# Altium PCB 主板.PcbDoc
Units mm, origin at the board's own origin, x right, y up, seen from the top; angles counter-clockwise.
Board outline 141.99 x 150.24 mm, 2 copper layers (Top Layer, Bottom Layer); 85 components, 80 nets, 354 pads, 36 vias.
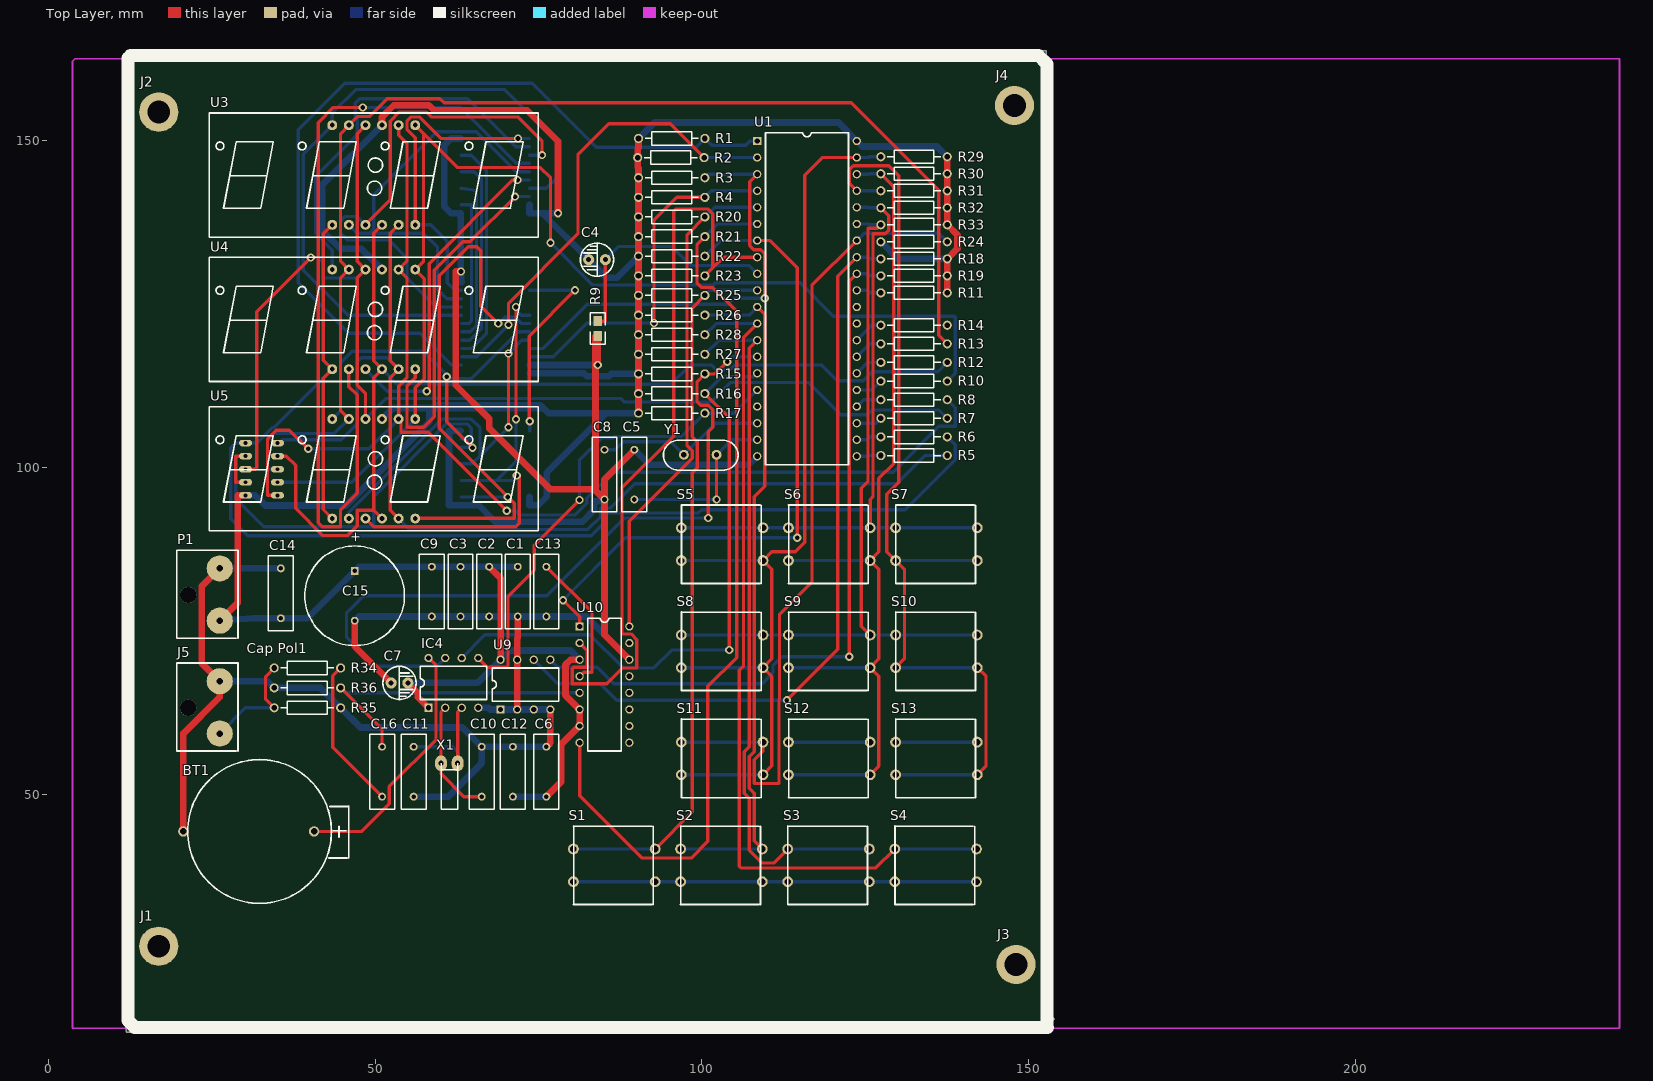
[diagram p0: Top Layer view]
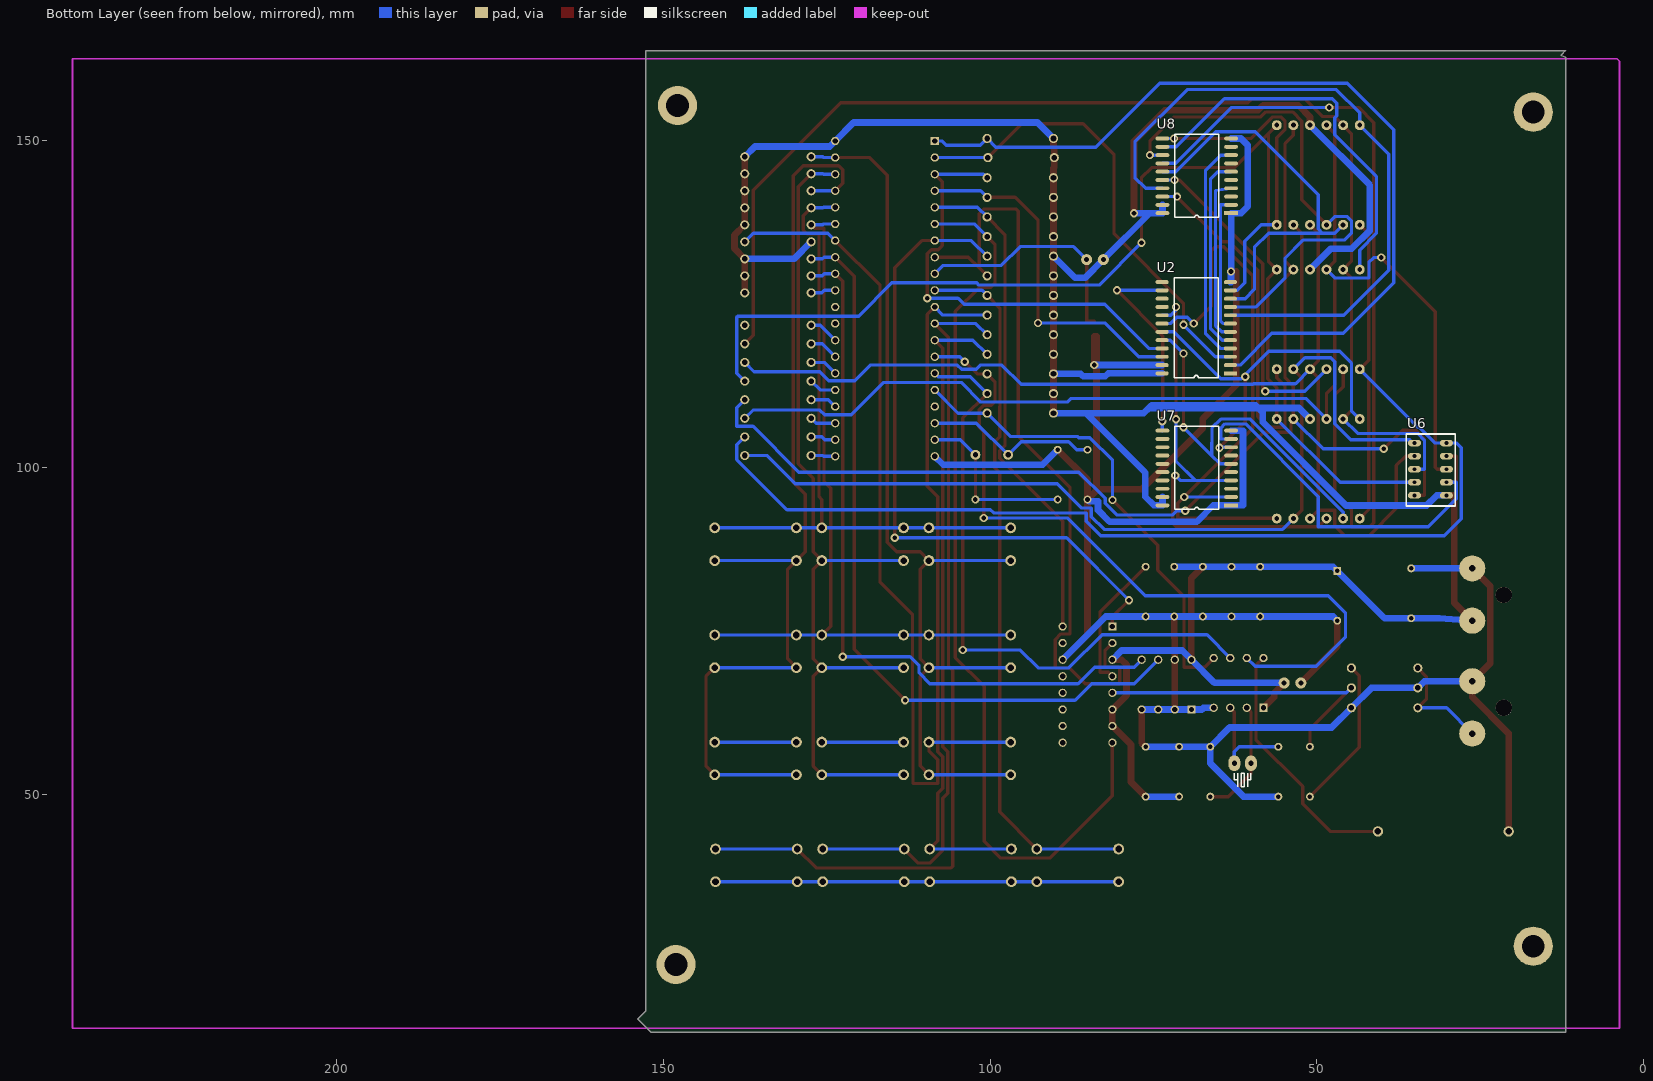
[diagram p1: Bottom Layer view, seen from below]

## Layer stack, top to bottom
Top Layer: signal copper 0.0356
Dielectric: dielectric 0.32, FR-4, Dk 4.8
Bottom Layer: signal copper 0.0356

## Board outline
11.938,162.814 11.938,13.589 151.892,13.589 153.924,15.621 152.654,16.891 152.654,163.83 11.938,163.83 12.573,163.195 12.573,163.068

## Design rules (kind name [scope] priority, off if disabled: settings)
Clearance [All] p1: gap=0.254
HoleSize [All] p1: absolutevalues=TRUE maxlimit=25.4 minlimit=0.025 maxpercent=80.000 minpercent=20.000
MinimumSolderMaskSliver [All] p1: minsoldermaskwidth=0
PolygonConnect [All] p1: connectstyle=Relief reliefconductorwidth=0.254 reliefentries=4 polygonreliefangle="90 Angle"
RoutingVias [All] p1: holewidth=0.711 width=1.27 viastyle="Through Hole" minholewidth=0.711 minwidth=1.27 maxholewidth=0.711 maxwidth=1.27
SilkToSilkClearance [All] p1: silktosilkclearance=0
SilkscreenOverComponentPads [All] p1: minsilkscreentomaskgap=0
SolderMaskExpansion [All] p1: expansion=0.102
Width Width_2 [InNet('DP')] p1: maxlimit=1.016 minlimit=1.016 preferedwidth=1.016 minimp=50.000000 maximp=50.000000 favimp=50.000000
Width Width_1 [InNet('GND')] p2: maxlimit=1.016 minlimit=1.016 preferedwidth=1.016 minimp=50.000000 maximp=50.000000 favimp=50.000000
Width [All] p3: maxlimit=0.508 minlimit=0.508 preferedwidth=0.508 minimp=50.000000 maximp=50.000000 favimp=50.000000
24 further rules are at their usual default settings.

## Components (designator, comment, footprint, x,y, rotation, side; value= is the part's Value field where it differs from the comment)
BT1 "Battery" CR2032-2 40.64,44.323 r180 top
C1 "Cap" RAD-0.3 71.819,81.026 r90 top
C2 "Cap" RAD-0.3 67.437,81.026 r90 top
C3 "Cap" RAD-0.3 63.056,81.026 r90 top
C4 "CAPACITOR POL" 22U1 83.947,131.826 r0 top
C5 "Cap" RAD-0.3 89.662,98.933 r90 top
C6 "Cap" RAD-0.3 76.2,53.467 r90 top
C7 "CAPACITOR POL" 22U1 53.721,67.056 r180 top
C8 "Cap" RAD-0.3 85.09,98.933 r90 top
C9 "Cap" RAD-0.3 58.674,81.026 r90 top
C10 "Cap" RAD-0.3 66.294,53.467 r90 top
C11 "Cap" RAD-0.3 55.88,53.467 r90 top
C12 "Cap" RAD-0.3 71.078,53.467 r270 top
C13 "Cap" RAD-0.3 76.2,81.026 r90 top
C14 "Cap" RAD-0.3 35.56,80.772 r270 top
C15 "Cap Pol1" RB7.6-15 46.863,80.391 r90 top
C16 "Cap" RAD-0.3 51.054,53.467 r270 top
IC4 "DS1302" DIP8 58.166,63.246 r90 top
J1 "CON1" GDK 17.653,26.543 r0 top
J2 "CON1" GDK 17.653,154.178 r0 top
J3 "CON1" GDK 148.844,23.749 r0 top
J4 "CON1" GDK 148.59,155.194 r0 top
J5 "CON2" VOICE-1 26.215,67.31 r270 top
P1 "CON2" VOICE-1 26.215,84.582 r270 top
R1 "Res2" AXIAL-0.4 95.377,150.368 r180 top
R2 "Res2" AXIAL-0.4 95.25,147.447 r180 top
R3 "Res2" AXIAL-0.4 95.377,144.363 r180 top
R4 "Res2" AXIAL-0.4 95.377,141.361 r180 top
R5 "Res2" AXIAL-0.4 132.461,101.854 r0 top
R6 "Res2" AXIAL-0.4 132.461,104.702 r0 top
R7 "Res2" AXIAL-0.4 132.461,107.551 r0 top
R8 "Res2" AXIAL-0.4 132.461,110.399 r0 top
R9 "R-10K" 0805R 84.074,120.142 r90 top
R10 "Res2" AXIAL-0.4 132.461,113.248 r0 top
R11 "Res2" AXIAL-0.4 132.461,126.746 r180 top
R12 "Res2" AXIAL-0.4 132.461,116.096 r0 top
R13 "Res2" AXIAL-0.4 132.461,118.945 r0 top
R14 "Res2" AXIAL-0.4 132.461,121.793 r0 top
R15 "Res2" AXIAL-0.4 95.377,114.341 r180 top
R16 "Res2" AXIAL-0.4 95.377,111.339 r180 top
R17 "Res2" AXIAL-0.4 95.377,108.337 r180 top
R18 "Res2" AXIAL-0.4 132.461,131.953 r0 top
R19 "Res2" AXIAL-0.4 132.461,129.35 r0 top
R20 "Res2" AXIAL-0.4 95.377,138.359 r180 top
R21 "Res2" AXIAL-0.4 95.377,135.357 r180 top
R22 "Res2" AXIAL-0.4 95.377,132.355 r180 top
R23 "Res2" AXIAL-0.4 95.377,129.352 r180 top
R24 "Res2" AXIAL-0.4 132.461,134.556 r180 top
R25 "Res2" AXIAL-0.4 95.377,126.35 r180 top
R26 "Res2" AXIAL-0.4 95.377,123.348 r180 top
R27 "Res2" AXIAL-0.4 95.377,117.343 r180 top
R28 "Res2" AXIAL-0.4 95.377,120.346 r180 top
R29 "Res2" AXIAL-0.4 132.461,147.574 r0 top
R30 "Res2" AXIAL-0.4 132.461,144.97 r0 top
R31 "Res2" AXIAL-0.4 132.461,142.367 r0 top
R32 "Res2" AXIAL-0.4 132.461,139.763 r0 top
R33 "Res2" AXIAL-0.4 132.461,137.16 r0 top
R34 "Res2" AXIAL-0.4 39.624,69.342 r180 top
R35 "Res2" AXIAL-0.4 39.624,63.246 r0 top
R36 "Res2" AXIAL-0.4 39.624,66.294 r0 top
S1 "KEY4" PUSH12 80.361,33.169 r0 top
S2 "KEY4" PUSH12 96.754,33.169 r0 top
S3 "KEY4" PUSH12 113.147,33.169 r0 top
S4 "KEY4" PUSH12 129.54,33.169 r0 top
S5 "KEY4" PUSH12 96.871,82.311 r0 top
S6 "KEY4" PUSH12 113.264,82.311 r0 top
S7 "KEY4" PUSH12 129.657,82.311 r0 top
S8 "KEY4" PUSH12 96.871,65.92 r0 top
S9 "KEY4" PUSH12 113.264,65.92 r0 top
S10 "KEY4" PUSH12 129.657,65.92 r0 top
S11 "KEY4" PUSH12 96.871,49.53 r0 top
S12 "KEY4" PUSH12 113.264,49.53 r0 top
S13 "KEY4" PUSH12 129.657,49.53 r0 top
U1 "AT89C52" DIP40 108.458,149.987 r0 top
U2 "4514" SOP4510 63.219,114.427 r0 bottom
U3 "SR420561K" 5462B 74.93,154.178 r180 top
U4 "SR420561K" 5462B 74.93,132.08 r180 top
U5 "SR420561K" 5462B 74.93,109.22 r180 top
U6 "SN460561" 3121B 35.052,95.758 r180 bottom
U7 "74LS241" SOP241 63.119,94.234 r0 bottom
U8 "74LS241" SOP241 63.119,138.938 r0 bottom
U9 "AT24C02" DIP8 69.188,62.992 r90 top
U10 "YX5P055" DIP16 81.28,75.692 r0 top
X1 "XTAL1" X2 62.611,54.752 r180 top
Y1 "CRYSTAL" OSC2PR-1 98.933,100.711 r0 top

## Footprints (in the part's own frame and the unit in brackets; to place one, negate y for a bottom-side part, rotate by r counter-clockwise, add the part's x,y. Pads: shape width x height; smd on the part's side, far side on the other; paste and mask are expansions set on the pad)
22U1 [mm]
  round 1.7 hole 0.762: 1(-1.27,0) 2(1.27,0)
  silkscreen extent -2.54,-2.54 2.54,2.54
0805R [mil]
  rect 60x50 smd: 1(-0.48,-0.25) 2(89.52,-0.25)
  silkscreen extent -50,-45 140,45
3121B [mm]
  oval 2x1 hole 0.6: a(0.005,8) b(4.885,8) c(4.885,4) com1(4.885,2) com2(4.885,6) d(0.005,0) dp(4.885,0) e(0.005,2) f(0.005,6) g(0.005,4)
  silkscreen extent -1.26,-1.62 6.23,9.38
5462B [mil]
  round 60 hole 30: a(840.2,670) b(1240.2,670) c(1040.2,70) com1(740.2,670) com2(1040.2,670) com3(1140.2,670) com4(1240.2,70) d(840.2,70) dp(940.2,70) e(740.2,70) f(940.2,670) g(1140.2,70)
  silkscreen extent 0,-4 1980,744
AXIAL-0.4 [mm] "Axial Device, Thru-Hole; 2 Leads; 0."
  round 1.4 hole 0.85: 1(-5.08,0) 2(5.08,0)
  silkscreen extent -4.06,-1.02 4.06,1.02
CR2032-2 [mm]
  round 1.6 hole 1: 1(0,-0.003) 2(20,-0.003)
  silkscreen extent -5.33,-11 19.33,11
DIP8 [mil]
  rect 50x50 hole 32: 1(0,0)
  round 50 hole 32: 2(0,-100) 3(0,-200) 4(0,-300) 5(300,-300) 6(300,-200) 7(300,-100) 8(300,0)
  silkscreen extent 50,-350 250,50
DIP16 [mil]
  rect 50x50 hole 32: 1(0,0)
  round 50 hole 32: 2(0,-100) 3(0,-200) 4(0,-300) 5(0,-400) 6(0,-500) 7(0,-600) 8(0,-700) 9(300,-700) 10(300,-600) 11(300,-500) 12(300,-400) 13(300,-300) 14(300,-200) 15(300,-100) 16(300,0)
  silkscreen extent 50,-750 250,50
DIP40 [mil]
  rect 50x50 hole 32: 1(0,0)
  round 50 hole 32: 2(0,-100) 3(0,-200) 4(0,-300) 5(0,-400) 6(0,-500) 7(0,-600) 8(0,-700) 9(0,-800) 10(0,-900) 11(0,-1000) 12(0,-1100) 13(0,-1200) 14(0,-1300) 15(0,-1400) 16(0,-1500) 17(0,-1600) 18(0,-1700) 19(0,-1800) 20(0,-1900) 21(600,-1900) 22(600,-1800) 23(600,-1700) 24(600,-1600) 25(600,-1500) 26(600,-1400) 27(600,-1300) 28(600,-1200) 29(600,-1100) 30(600,-1000) 31(600,-900) 32(600,-800) 33(600,-700) 34(600,-600) 35(600,-500) 36(600,-400) 37(600,-300) 38(600,-200) 39(600,-100) 40(600,0)
  silkscreen extent 50,-1950 550,50
GDK [mm]
  round 6 hole 3.5: 1(-0.774,0.222)
OSC2PR-1 [mil]
  round 60 hole 32: 1(-66.72,49.28) 2(130.28,49.28)
  silkscreen extent -190,-43 260,137
PUSH12 [mil]
  round 65 hole 39.37: 1(-0.86,333.42) 2(491.27,333.42) 3(-0.86,136.57) 4(491.27,136.57)
  silkscreen extent -3,-2 480,472
RAD-0.3 [mm] "Radial Cap, Thru-Hole; 2 Leads; 0."
  round 1.2 hole 0.7: 1(-3.81,0) 2(3.81,0)
  silkscreen extent -5.71,-1.9 5.71,1.91
RB7.6-15 [mm] "Polarized Capacitor (R"
  rect 1.2x1.2 hole 0.7: 1(3.81,0)
  round 1.2 hole 0.7: 2(-3.81,0)
  silkscreen extent -7.62,-7.62 7.62,7.62
SOP241 [mm]
  rect 2.1x0.6 smd: 1(0,0)
  oval 2.1x0.6 smd: 2(0,-1.27) 3(0,-2.54) 4(0,-3.81) 5(0,-5.08) 6(0,-6.35) 7(0,-7.62) 8(0,-8.89) 9(0,-10.16) 10(0,-11.43) 11(10.5,-11.43) 12(10.5,-10.16) 13(10.5,-8.89) 14(10.5,-7.62) 15(10.5,-6.35) 16(10.5,-5.08) 17(10.5,-3.81) 18(10.5,-2.54) 19(10.5,-1.27) 20(10.5,0)
  silkscreen extent 1.88,-12.06 8.62,0.64
SOP4510 [mm]
  rect 2x0.6 smd: 1(0,0)
  oval 2x0.6 smd: 2(0,-1.27) 3(0,-2.54) 4(0,-3.81) 5(0,-5.08) 6(0,-6.35) 7(0,-7.62) 8(0,-8.89) 9(0,-10.16) 10(0,-11.43) 11(0,-12.7) 12(0,-13.97) 13(10.45,-13.97) 14(10.45,-12.7) 15(10.45,-11.43) 16(10.45,-10.16) 17(10.45,-8.89) 18(10.45,-7.62) 19(10.45,-6.35) 20(10.45,-5.08) 21(10.45,-3.81) 22(10.45,-2.54) 23(10.45,-1.27) 24(10.45,0)
  silkscreen extent 1.83,-14.6 8.62,0.64
VOICE-1 [mm]
  round 4 hole 1: 1(0,0) 2(8,0)
  round 2.5 hole 2.5: 3(4.064,-4.826)
  silkscreen extent -2.79,-6.6 10.67,2.79
X2 [mm]
  oval 1.8x2.4 hole 0.8: 1(0,0) 2(2.54,0)
  silkscreen extent 0,0 2.54,7

## Part data
BT1: "Multicell Batte"
C1 C2 C3 C5 C6 C8 C9 C10 C11 C12 C13 C14 C16: "Capacitor"
C4 C7: "Capacit"
C15: "Polarized Capacitor (Radial)"
IC4: library part DS13
J1 J2 J3 J4 J5 P1: "Connect"
R1 R2 R3 R4 R5 R6 R7 R8 R10 R11 R12 R13 R14 R15 R16 R17 R18 R19 R20 R21 R22 R23 R24 R25 R26 R27 R28 R29 R30 R31 R32 R33 R34 R35 R36: "Resistor"
R9: "resist"
S1 S2 S3 S4 S5 S6 S7 S8 S9 S10 S11 S12 S13: library part KE
U1: "8-Bit Microcontroller with 8K Flash R"
U2: library part 45
U3 U4 U5: "CP-SR42056"
U6: "CP-SN46056"
U7 U8: library part 74LS2
U10: library part YX5P0
X1: library part XTA
Y1: "Cryst"

## Via types
v1: diameter 1.27, hole 0.711, Top Layer to Bottom Layer, 36 vias

## Nets (pads, with @x,y where several pads share a name; then routed paths per layer and width w, separated by ;. In a path a pad name is that pad's centre, name@x,y a point inside that pad or via, vN(x,y) a via of type N, cw(c..) or ccw(c..) an arc to the next point about the centre after c; other vN are vias at no path point)
BJ1: R25.1 S1.1 S1.2 U1.10 | length 109.3
  Top Layer w0.508: S1.2 98.527,47.326 98.527,99.238 99.27,99.982 99.27,103.995 98.527,104.738 98.527,109.329 98.487,109.369 98.487,124.38 R25.1
  Bottom Layer w0.508: S1.1 S1.2 ; R25.1 101.234,127.127 U1.10
BJ2: R26.1 S2.1 S2.2 U1.11 | length 106.2
  Top Layer w0.508: U1.11 109.601,123.444 109.601,97.13 108.001,95.529 108.001,56.505 107.254,55.757 107.254,50.903 108.001,50.156 108.001,42.87 S2.2
  Bottom Layer w0.508: S2.1 S2.2 ; R26.1 107.219,123.348 U1.11
BJ3: R27.1 S3.1 S3.2 U1.13 | length 108.1
  Top Layer w0.508: U1.13 107.239,118.288 107.239,57.267 106.492,56.519 106.492,50.141 107.239,49.394 107.239,41.478 109.22,39.497 110.984,39.497 S3.1
  Bottom Layer w0.508: R27.1 102.621,119.507 U1.13 ; S3.1 S3.2
BJ4: R28.1 S4.1 S4.2 U1.12 | length 130.5
  Top Layer w0.508: U1.12 106.375,119.964 106.375,69.647 105.715,68.986 105.715,38.989 105.969,38.735 126.615,38.735 S4.1
  Bottom Layer w0.508: R28.1 102.158,122.047 U1.12 ; S4.1 S4.2
DA: R5.2 U3.a U4.a U5.a U6.a | length 167.8
  Top Layer w0.508: U5.a 52.319,93.472 52.319,113.792 U4.a 52.319,116.332 52.319,135.89 U3.a
  Bottom Layer w0.508: U6.a 35.744,103.758 35.744,104.279 44.838,104.279 47.239,106.68 47.239,116.205 47.874,116.84 51.811,116.84 U4.a ; U5.a 55.247,90.544 82.556,90.544 84.502,92.489 84.502,93.828 86.03,93.828 89.738,97.536 129.794,97.536 134.112,101.854 R5.2
DB: R6.2 U3.b U4.b U5.b U6.b | length 200.1
  Top Layer w0.508: U5.b 42.037,93.594 42.037,113.67 U4.b 42.037,116.454 42.037,135.768 U3.b
  Bottom Layer w0.508: U4.b 34.522,106.155 34.29,106.155 31.893,103.758 U6.b 28.575,103.758 27.889,103.072 27.889,92.177 30.48,89.586 83.058,89.586 85.264,91.791 85.264,93.066 99.441,93.066 99.949,93.574 131.089,93.574 138.76,101.244 138.76,103.483 R6.2
DC: R7.2 U3.c U4.c U5.c U6.c | length 190.7
  Top Layer w0.508: U6.c 31.547,99.758 31.852,100.063 31.852,123.876 v1(40.132,132.156) ; U5.c 48.509,111.369 47.239,112.639 47.239,129.032 U4.c 47.239,131.572 47.239,151.13 U3.c
  Bottom Layer w0.508: v1(40.132,132.156) 41.303,132.156 42.014,131.445 42.014,129.032 47.239,129.032 U4.c ; U5.c 51.633,110.566 87.63,110.566 88.163,110.033 101.422,110.033 104.419,113.03 116.281,113.03 121.234,108.077 125.324,108.077 126.06,108.814 136.278,108.814 R7.2
DD: R8.2 U3.d U4.d U5.d U6.d | length 183.8
  Top Layer w0.508: U6.d 33.528,95.758 33.528,104.394 34.874,105.74 36.881,105.74 v1(39.751,102.87) ; U3.d 53.589,150.876 54.859,149.606 54.859,131.572 U4.d 54.859,129.032 54.859,113.737 53.589,112.467 U5.d 53.941,107.09 53.941,105.41 58.141,105.41 v1(70.129,93.421)
  Bottom Layer w0.508: v1(39.751,102.87) 49.017,102.87 U5.d ; v1(70.129,93.421) 71.399,93.421 72.06,92.761 80.637,92.761 82.398,94.521 82.398,95.3 86.411,99.314 129.261,99.314 136.271,106.324 138.76,106.324 138.76,109.18 R8.2
DE: R10.2 U3.e U4.e U5.e U6.e | length 181.6
  Top Layer w0.508: U5.e 56.129,112.213 57.506,113.589 57.506,128.925 U4.e 57.404,131.577 57.404,151.125 ; U3.e 57.404,151.125 ; v1(76.835,134.417) 76.835,144.348 75.26,145.923 62.606,145.923 57.404,151.125
  Bottom Layer w0.508: U6.e 46.445,97.758 U5.e ; v1(76.835,134.417) 83.312,127.94 101.727,127.94 102.057,128.27 115.037,128.27 120.117,123.19 138.633,123.19 138.76,123.063 138.76,114.467 R10.2
DF: R12.2 U3.f U4.f U5.f U6.f | length 165
  Top Layer w0.508: U6.f 36.393,101.758 37.821,100.33 37.821,93.802 42.012,89.611 45.72,89.611 47.239,91.13 47.239,93.472 49.779,93.472 ; U5.f 49.779,93.472 ; U3.f 49.779,135.89 49.779,116.332 U4.f 49.779,113.792 49.779,93.472
  Bottom Layer w0.508: U4.f 53.254,112.857 59.673,112.857 59.792,112.738 95.263,112.738 98.222,115.697 101.49,115.697 102.133,115.053 104.354,115.053 104.998,115.697 118.313,115.697 120.726,113.284 124.689,113.284 126.086,114.681 136.126,114.681 R12.2
DG: R13.2 U3.g U4.g U5.g U6.g | length 188.6
  Top Layer w0.508: U5.g 44.699,108.712 44.699,129.032 U4.g 44.699,131.572 44.699,151.13 U3.g 47.29,153.721 49.068,153.721 51.811,156.464 59.912,156.464 60.547,155.829 122.86,155.829 136.22,142.469 136.22,120.265 R13.2
  Bottom Layer w0.508: U6.g 33.528,99.758 33.528,104.216 34.544,105.232 43.759,105.232 U5.g
DP: C1.2 C2.2 C3.2 C4.1 C6.1 C7.1 C9.2 C12.2 C14.2 C15.1 IC4.1 P1.2 R1.2 R2.2 R3.2 R4.2 R11.1 R15.2 R16.2 R17.2 R18.2 R19.2 R20.2 R21.2 R22.2 R23.2 R24.2 R25.2 R26.2 R27.2 R28.2 R29.2 R30.2 R31.2 R32.2 R33.2 U1.40 U2.24 U3.dp U4.dp U5.dp U6.dp U7.19 U7.20 U8.19 U8.20 U9.8 U10.3 U10.6 U10.7 | length 507.5
  Top Layer w1.016: P1.2 28.981,79.348 28.981,95.758 U6.dp ; U3.dp 51.049,153.665 52.832,155.448 58.217,155.448 58.979,154.686 73.228,154.686 77.978,149.936 v1(77.978,138.938) ; C7.1 56.515,65.532 56.515,64.897 IC4.1 ; C2.2 69.188,83.085 U9.8 ; C6.1 78.435,51.892 78.435,57.607 U10.7 U10.6 79.121,65.151 79.121,69.85 79.883,70.612 U10.3 ; R17.2 R16.2 R15.2 R27.2 R28.2 R26.2 R25.2 R23.2 R22.2 R21.2 R20.2 R4.2 R3.2 90.297,145.821 90.17,145.948 R2.2 90.17,148.819 90.297,148.946 R1.2 ; R11.1 R19.2 R18.2 139.116,133.528 139.116,135.585 R33.2 R32.2 R31.2 R30.2 R29.2
  Bottom Layer w1.016: P1.2 31.266,76.962 C14.2 39.624,76.962 C15.1 47.498,84.836 C9.2 C3.2 C2.2 C1.2 ; U6.dp 31.648,95.758 33.198,94.209 45.531,94.209 58.259,106.937 58.259,108.458 58.927,109.127 ; U5.dp 52.733,109.127 58.927,109.127 ; U4.dp 47.843,133.508 44.647,133.508 41.885,136.271 41.885,143.236 U3.dp ; C7.1 65.632,67.056 U9.8 70.585,72.009 79.883,72.009 U10.3 ; C12.2 C6.1 ; U7.19 U7.20 74.93,94.234 76.251,95.555 76.251,99.238 85.35,108.337 ; U8.19 U8.20 75.565,138.938 ; U2.24 81.915,114.427 82.362,113.98 85.762,113.98 86.123,114.341 R15.2 ; v1(77.978,138.938) 75.565,138.938 ; R17.2 85.35,108.337 ; R22.2 86.974,129.032 85.471,129.032 C4.1 75.565,138.938 ; R1.2 92.735,152.806 120.879,152.806 U1.40 124.536,149.149 135.966,149.149 R29.2 ; R24.2 129.984,131.953 R18.2 ; 58.927,109.127 59.346,109.545 75.286,109.545 75.704,109.127 ; 58.927,109.127 75.704,109.127 ; 75.704,109.127 76.494,108.337 85.35,108.337
GND: BT1.2 C1.1 C2.1 C3.1 C5.2 C6.2 C7.2 C8.1 C9.1 C10.2 C11.1 C12.1 C13.1 C14.1 C15.2 IC4.4 J5.1 P1.1 R9.1 R35.2 R36.1 U1.20 U2.12 U2.23 U7.1 U7.10 U8.1 U8.10 U9.1 U9.2 U9.3 U9.4 U9.7 U10.14 | length 423.3
  Top Layer w1.016: BT1.2 20.64,59.324 26.215,64.9 J5.1 23.444,70.081 23.444,81.811 P1.1 ; C15.2 46.863,72.644 C7.2 ; v1(63.137,130.023) 62.332,130.023 62.332,112.602 67.441,107.493 67.441,106.045 76.774,96.712 83.501,96.712 83.718,96.495 ; U9.2 U9.7 71.728,73.863 71.819,73.954 C1.1 ; C6.2 76.808,57.885 U9.4 ; v1(84.08,115.697) R9.1 83.718,120.13 83.718,96.495 ; U10.14 85.09,74.422 C8.1 ; C5.2 85.09,98.171 C8.1 ; 83.718,96.495 C8.1
  Bottom Layer w1.016: J5.1 33.528,67.31 R36.1 41.656,66.294 R35.2 47.727,60.223 63.348,60.223 C10.2 ; P1.1 C14.1 ; C15.2 47.498,77.216 C9.1 C3.1 C2.1 C1.1 C13.1 82.296,77.216 U10.14 ; C11.1 61.214,49.657 66.294,54.737 C10.2 ; U7.10 61.305,105.664 61.305,94.234 U7.1 65.837,94.234 68.351,91.72 81.7,91.72 83.486,93.505 83.486,94.844 84.811,94.844 C8.1 ; U8.1 U8.1@63.097,138.938 ; U8.10 61.595,150.368 60.545,149.318 60.545,139.988 61.595,138.938 U8.1@63.097,138.938 ; v1(63.137,130.023) U2.12@63.137,128.397 ; U2.12 U2.12@63.137,128.397 ; IC4.4 67.335,63.246 67.589,62.992 U9.1 U9.2 U9.3 U9.4 ; U2.23 v1(84.08,115.697) ; C6.2 C12.1 C10.2 ; C5.2 91.973,100.432 107.163,100.432 U1.20 ; U8.1@63.097,138.938 63.097,128.397 U2.12@63.137,128.397
IO: IC4.6 R16.1 U1.15 | length 95.7
  Top Layer w0.508: R16.1 104.191,107.605 v1(104.191,72.085)
  Bottom Layer w0.508: IC4.6 66.802,74.422 82.855,74.422 87.935,69.342 92.634,69.342 95.377,72.085 v1(104.191,72.085) ; R16.1 103.012,113.894 107.925,113.894 U1.15
KEY1: R29.1 S5.3 S5.4 S8.3 S8.4 S11.3 S11.4 U1.39 | length 149.1
  Top Layer w0.508: S11.4 110.693,54.343 110.693,68.045 S8.4 110.693,70.734 110.693,84.436 S5.4 110.691,87.122 114.3,87.122 115.722,88.544 115.722,144.78 118.389,147.447 U1.39
  Bottom Layer w0.508: S11.3 S11.4 ; S8.3 S8.4 ; S5.3 S5.4 ; U1.39 125.476,147.447 125.603,147.574 R29.1
KEY2: R30.1 S6.3 S6.4 S9.3 S9.4 S12.3 S12.4 U1.38 | length 137.7
  Top Layer w0.508: S12.4 127.076,54.333 127.076,68.055 S9.4 127.076,70.724 127.076,84.446 S6.4 127.076,87.114 127.076,98.349 129.351,100.624 129.351,143 R30.1
  Bottom Layer w0.508: S12.3 S12.4 ; S9.3 S9.4 ; S6.3 S6.4 ; U1.38 125.501,144.907 125.565,144.97 R30.1
KEY3: R31.1 S7.3 S7.4 S10.3 S10.4 S13.3 S13.4 U1.37 | length 148.6
  Top Layer w0.508: U1.37 122.555,143.51 122.555,145.567 123.19,146.202 128.6,146.202 130.124,144.678 130.124,97.765 128.295,95.936 128.295,87.12 S7.3 130.988,84.427 130.988,70.742 S10.3 ; S13.4 143.485,54.348 143.485,68.04 S10.4
  Bottom Layer w0.508: U1.37 R31.1 ; S13.3 S13.4 ; S10.3 S10.4 ; S7.3 S7.4
KEY4: R32.1 S5.1 S5.2 S6.1 S6.2 S7.1 S7.2 U1.36 | length 100.7
  Top Layer w0.508: S6.2 125.742,95.123 126.173,95.554 126.173,135.788 128.016,135.788 128.589,136.361 128.589,138.555 R32.1
  Bottom Layer w0.508: S5.1 S5.2 S6.1 S6.2 S7.1 S7.2 ; U1.36 125.501,139.827 125.565,139.763 R32.1
KEY5: R33.1 S8.1 S8.2 S9.1 S9.2 S10.1 S10.2 U1.35 | length 114.4
  Top Layer w0.508: S9.2 124.384,75.748 124.384,96.845 125.411,97.872 125.411,136.609 126.83,136.609 R33.1
  Bottom Layer w0.508: S8.1 S8.2 S9.1 S9.2 S10.1 S10.2 ; U1.35 125.476,137.287 125.603,137.16 R33.1
KEY6: R24.1 S11.1 S11.2 U1.34 | length 126
  Top Layer w0.508: S11.2 109.349,56.644 108.016,55.311 108.016,51.664 111.785,51.664 111.862,77.495 116.84,82.474 116.84,127.889 U1.34
  Bottom Layer w0.508: S11.1 S11.2 ; U1.34 124.841,135.89 136.207,135.89 R24.1
LEDA: U7.12
MRST: C4.2 R9.2 U1.9 | length 36.3
  Top Layer w0.508: R9.2 85.217,122.416 C4.2
  Bottom Layer w0.508: C4.2 87.224,133.833 95.377,133.833 98.273,130.937 107.188,130.937 U1.9
NetBT1_1: BT1.1 IC4.8 | length 39
  Top Layer w0.508: BT1.1 47.958,44.326 52.172,48.539 52.172,51.206 59.309,58.344 59.309,69.723 IC4.8
NetC5_1: C5.1 U1.19 Y1.2 | length 26.6
  Top Layer w0.508: v1(102.242,95.123) Y1.2
  Bottom Layer w0.508: C5.1 v1(102.242,95.123) ; Y1.2 104.546,104.267 U1.19
NetC8_2: C8.2 U1.18 Y1.1 | length 26.7
  Bottom Layer w0.508: C8.2 86.766,102.743 87.986,103.962 95.239,103.962 Y1.1 102.083,106.807 U1.18
NetC10_1: C10.1 IC4.2 X1.2 | length 18
  Top Layer w0.508: IC4.2 60.071,62.611 X1.2 60.071,53.137 63.551,49.657 C10.1
NetC11_2: C11.2 IC4.3 X1.1 | length 17.6
  Top Layer w0.508: X1.1 62.611,62.611 IC4.3
  Bottom Layer w0.508: C11.2 61.849,57.277 62.611,56.515 X1.1
NetC13_2: C13.2 U10.4 | length 21.2
  Top Layer w0.508: C13.2 83.185,77.851 83.185,68.707 81.915,68.707 U10.4
NetC16_2: C16.2 R34.1 | length 23.3
  Top Layer w0.508: R34.1 43.485,68.123 43.485,57.226 C16.2
NetJ5_2: J5.2 R34.2 R35.1 | length 17.1
  Top Layer w0.508: R35.1 33.223,64.567 33.223,68.021 R34.2
  Bottom Layer w0.508: J5.2 30.151,63.246 R35.1
NetR5_1: R5.1 U1.21 | length 3.7
  Bottom Layer w0.508: U1.21 125.476,101.727 125.603,101.854 R5.1
NetR6_1: R6.1 U1.22 | length 3.9
  Bottom Layer w0.508: U1.22 125.298,104.267 125.734,104.702 R6.1
NetR7_1: R7.1 U1.23 | length 4
  Bottom Layer w0.508: U1.23 126.637,106.807 R7.1
NetR8_1: R8.1 U1.24 | length 4.1
  Bottom Layer w0.508: U1.24 124.75,110.399 R8.1
NetR10_1: R10.1 U1.25 | length 4.2
  Bottom Layer w0.508: U1.25 126.02,111.887 R10.1
NetR11_2: R11.2 U1.31 | length 3.8
  Bottom Layer w0.508: U1.31 125.349,127.127 125.73,126.746 R11.2
NetR12_1: R12.1 U1.26 | length 4.4
  Bottom Layer w0.508: U1.26 125.367,116.096 R12.1
NetR13_1: R13.1 U1.27 | length 4.5
  Bottom Layer w0.508: U1.27 125.676,118.945 R13.1
NetR14_1: R14.1 U1.28 | length 4.6
  Bottom Layer w0.508: U1.28 125.984,121.793 R14.1
NetS1_3: S1.3 S1.4 S2.3 S2.4 S3.3 S3.4 S4.3 S4.4 | length 61.7
  Bottom Layer w0.508: S1.3 S1.4 S2.3 S2.4 S3.3 S3.4 S4.3 S4.4
NetS12_1: S12.1 S12.2 | length 12.5
  Bottom Layer w0.508: S12.1 S12.2
NetS13_1: S13.1 S13.2 | length 12.5
  Bottom Layer w0.508: S13.1 S13.2
RST: IC4.5 R17.1 U1.16 | length 73
  Top Layer w0.508: IC4.5 67.183,69.469 70.333,69.469 70.333,80.315 74.346,84.328 74.346,88.138 v1(81.255,95.047)
  Bottom Layer w0.508: v1(81.255,95.047) 81.255,101.117 84.709,104.572 86.462,104.572 86.665,104.775 96.895,104.775 R17.1 104.908,108.337 U1.16
S1_1: U8.9
S1_2: U8.7
S1_3: U8.5
S1_4: U8.3
S2_1: U4.com1 U8.18 | length 56
  Top Layer w0.508: U4.com1 56.129,113.741 54.859,112.471 54.859,106.172 57.404,106.172 59.055,107.823 59.055,112.776 59.03,112.801 59.03,130.226 63.373,134.569 64.491,134.569 v1(71.399,141.478)
  Bottom Layer w0.508: v1(71.399,141.478) U8.18
S2_2: U4.com2 U8.16 | length 51.1
  Top Layer w0.508: v1(57.912,111.709) 58.268,112.065 58.268,131.224 71.062,144.018 v1(71.78,144.018)
  Bottom Layer w0.508: U4.com2 51.862,111.709 v1(57.912,111.709) ; v1(71.78,144.018) U8.16
S2_3: U4.com3 U8.14 | length 127.5
  Top Layer w0.508: U4.com3 45.969,112.395 47.239,111.125 47.239,96.083 44.699,93.543 44.699,90.932 41.91,90.932 41.275,91.567 41.275,152.781 43.612,155.118 v1(48.108,155.118)
  Bottom Layer w0.508: v1(48.108,155.118) 62.992,155.118 71.552,146.558 U8.14
S2_4: U4.com4 U8.12 | length 59.3
  Bottom Layer w0.508: U4.com4 43.429,133.29 40.869,135.85 40.869,144.557 47.239,150.927 47.239,153.543 46.965,153.817 46.965,155.778 47.625,156.439 64.135,156.439 71.476,149.098 U8.12
S3_1: U7.18
S3_2: U7.16
S3_3: U7.14
S4: U6.com1 U6.com2 U7.9 | length 61.6
  Top Layer w0.508: U6.com1 28.651,97.758 28.651,101.758 U6.com2
  Bottom Layer w0.508: U6.com1 28.651,97.758 28.651,95.25 32.969,90.932 49.779,90.932 49.779,95.575 60.884,106.68 64.059,106.68 64.694,106.045 64.694,104.394 U7.9
SCL: R18.1 U1.33 U9.6 | length 117.3
  Top Layer w0.508: v1(113.005,64.389) 120.802,72.187 120.802,129.311 U1.33
  Bottom Layer w0.508: U9.6 77.951,66.929 84.455,66.929 86.995,64.389 v1(113.005,64.389) ; U1.33 125.4,132.207 125.654,131.953 R18.1
SCLK: IC4.7 R15.1 U1.14 | length 116.2
  Top Layer w0.508: v1(100.965,92.304) 100.965,105.461 101.676,106.172 101.676,108.839 100.965,109.55 99.808,109.55 99.249,110.109 99.249,113.133 R15.1 101.997,114.341 v1(103.861,116.205)
  Bottom Layer w0.508: IC4.7 59.436,69.596 50.063,69.596 45.618,74.041 45.618,77.775 48.26,80.416 76.272,80.416 88.159,92.304 v1(100.965,92.304) ; v1(103.861,116.205) 104.623,116.967 U1.14
SD1: R1.1 U1.1 U2.2 | length 132.1
  Bottom Layer w0.508: U2.2 61.722,115.697 56.871,120.548 45.974,120.548 38.227,128.295 38.227,151.714 45.339,158.826 74.041,158.826 83.82,149.047 99.136,149.047 R1.1 101.473,149.352 106.743,149.352 107.379,149.987 U1.1
SD2: R2.1 U1.2 U2.3 | length 71.2
  Top Layer w0.508: v1(70.409,121.869) 70.409,125.171 81.026,135.788 81.026,147.879 85.776,152.629 95.148,152.629 R2.1
  Bottom Layer w0.508: U2.3 65.507,116.967 v1(70.409,121.869) ; R2.1 U1.2
SD3: R3.1 U1.3 U2.21 | length 68.3
  Top Layer w0.508: U1.3 107.315,143.764 107.315,133.985 107.95,133.35 108.966,133.35 109.601,132.715 v1(109.601,125.933)
  Bottom Layer w0.508: U2.21 75.717,118.237 82.474,124.993 103.962,124.993 104.902,125.933 v1(109.601,125.933) ; R3.1 101.001,144.907 U1.3
SD4: R4.1 U1.4 U2.22 | length 54.5
  Top Layer w0.508: v1(92.659,122.123) 92.659,137.846 96.175,141.361 R4.1
  Bottom Layer w0.508: U2.22 77.241,116.967 82.398,122.123 v1(92.659,122.123) ; R4.1 101.463,142.367 U1.4
SDA: R19.1 U1.32 U9.5 | length 112.5
  Top Layer w0.508: v1(122.555,71.069) 122.555,128.524 U1.32
  Bottom Layer w0.508: U9.5 77.951,69.469 83.998,69.469 86.538,66.929 109.22,66.929 110.871,68.58 110.871,69.698 112.243,71.069 v1(122.555,71.069) ; U1.32 125.374,129.667 125.692,129.35 R19.1
SI1_1: U2.11 U3.com1 U8.11 | length 51.8
  Top Layer w0.508: U3.com1 56.129,150.495 54.859,151.765 54.859,153.035 55.494,153.67 56.744,153.67 60.046,150.368 v1(71.857,150.368)
  Bottom Layer w0.508: U3.com1 58.496,137.16 61.036,134.62 61.036,128.27 62.179,127.127 U2.11 ; v1(71.857,150.368) U8.11
SI1_2: U2.9 U3.com2 U8.13 | length 78.6
  Top Layer w0.508: U3.com2 52.319,140.97 52.319,153.035 53.716,154.432 57.787,154.432 58.549,153.67 71.798,153.67 75.54,149.928 v1(75.54,147.828)
  Bottom Layer w0.508: U3.com2 47.239,138.43 45.334,138.43 44.699,137.795 44.699,135.89 45.766,134.823 52.116,134.823 54.859,132.08 54.859,129.032 59.304,124.587 U2.9 ; U8.13 v1(75.54,147.828)
SI1_3: U2.10 U3.com3 U8.15 | length 62.2
  Bottom Layer w0.508: U3.com3 47.239,135.89 49.144,135.89 ; U2.10 60.96,125.857 59.538,127.279 59.538,133.731 57.379,135.89 49.144,135.89 ; U8.15 71.577,145.288 65.456,151.409 59.411,151.409 49.779,141.778 49.779,136.525 49.144,135.89
SI1_4: U2.8 U3.com4 U8.17 | length 102.6
  Bottom Layer w0.508: U2.8 45.898,123.317 38.989,130.226 38.989,147.96 U3.com4 43.429,154.3 46.99,157.861 69.825,157.861 77.826,149.86 77.826,144.374 76.2,142.748 U8.17
SI2_1: U2.7 U8.2 | length 21
  Bottom Layer w0.508: U8.2 64.694,140.208 64.745,140.157 64.745,122.504 64.287,122.047 U2.7
SI2_2: U2.6 U8.4 | length 25.8
  Bottom Layer w0.508: U8.4 65.507,142.418 65.507,121.742 64.541,120.777 U2.6
SI2_3: U2.5 U8.6 | length 30.2
  Bottom Layer w0.508: U8.6 65.126,145.288 66.269,144.145 66.269,121.328 64.448,119.507 U2.5
SI2_4: U2.4 U8.8 | length 34.6
  Bottom Layer w0.508: U8.8 64.694,147.828 67.031,145.491 67.031,120.498 64.77,118.237 U2.4
SI3_1: U2.18 U5.com1 U7.2 | length 91.9
  Top Layer w0.508: U5.com1 56.205,92.278 71.272,92.278 71.272,94.539 ; v1(68.834,122.047) 66.167,124.714 66.167,133.172 65.532,133.807 64.208,133.807 59.792,129.39 59.792,113.589 59.817,113.563 59.817,106.02 71.272,94.564 71.272,94.539 ; v1(70.307,95.504) 71.272,94.539
  Bottom Layer w0.508: U7.2 v1(70.307,95.504) ; v1(68.834,122.047) 69.799,123.012 71.425,123.012 72.39,122.047 U2.18
SI3_2: U2.17 U5.com2 U7.4 | length 71.4
  Top Layer w0.508: U5.com2 49.779,90.932 71.5,90.932 72.034,91.466 72.034,98.451 v1(71.68,98.806) ; v1(71.552,107.417) v1(71.552,124.587)
  Bottom Layer w0.508: U7.4 68.58,98.044 ; v1(71.552,107.417) 71.552,101.016 68.58,98.044 ; v1(71.552,124.587) 71.552,124.079 72.314,123.317 U2.17 ; v1(71.68,98.806) 70.918,98.044 68.58,98.044
SI3_3: U2.20 U5.com3 U7.6 | length 56.8
  Top Layer w0.508: v1(70.409,106.197) v1(70.409,117.475)
  Bottom Layer w0.508: U5.com3 45.969,93.21 60.201,107.442 64.668,107.442 66.04,106.07 66.053,101.841 ; U7.6 64.795,100.584 66.053,101.841 ; v1(70.409,106.197) 66.053,101.841 ; v1(70.409,117.475) 72.441,119.507 U2.20
SI3_4: U2.19 U5.com4 U7.8 | length 58
  Top Layer w0.508: v1(60.935,113.894) 60.935,107.01 v1(64.897,103.048)
  Bottom Layer w0.508: U5.com4 44.699,108.712 44.699,116.022 46.482,117.805 57.358,117.805 v1@61.102,114.061 ; v1(60.935,113.894) v1@61.102,114.061 ; U7.8 64.821,103.124 v1(64.897,103.048) ; U2.19 71.857,120.777 64.699,113.619 61.544,113.619 v1@61.102,114.061
SI4: U2.14 U7.11 | length 31.3
  Top Layer w0.508: v1(73.635,107.112) 73.584,107.163 73.584,120.142 v1(80.569,127.127)
  Bottom Layer w0.508: U7.11 73.635,105.664 v1(73.635,107.112) ; U2.14 v1(80.569,127.127)
VOICE1: R20.1 U1.5 U10.16 | length 76.7
  Top Layer w0.508: U10.16 88.9,91.821 98.508,101.429 98.508,102.584 97.725,103.367 97.725,135.627 R20.1
  Bottom Layer w0.508: R20.1 101.925,139.827 U1.5
VOICE2: R21.1 U1.6 U10.8 | length 140
  Top Layer w0.508: U10.8 81.28,49.809 90.83,40.259 98.349,40.259 100.914,42.824 100.914,66.523 105.334,70.942 105.334,123.901 101.676,127.559 99.949,127.559 99.238,128.27 99.238,134.138 R21.1
  Bottom Layer w0.508: R21.1 102.387,137.287 U1.6
VOICE3: R22.1 U1.7 U10.1 | length 103
  Top Layer w0.508: v1(78.74,79.705) 81.28,77.165 U10.1 ; U1.7 110.424,134.747 114.579,130.592 v1(114.579,89.256)
  Bottom Layer w0.508: v1(78.74,79.705) 88.29,89.256 v1(114.579,89.256) ; R22.1 102.849,134.747 U1.7
VOICE4: R23.1 U1.8 U10.2 | length 118.6
  Top Layer w0.508: U10.2 82.423,72.009 82.423,69.469 80.391,69.469 80.137,69.215 80.137,66.929 85.446,66.929 87.859,69.342 90.043,69.342 90.043,73.66 89.154,74.549 87.757,74.549 87.757,96.901 95.682,104.826 95.682,139.243 96.012,139.573 100.965,139.573 101.676,138.862 101.676,130.572 ; R23.1 101.676,130.572 ; U1.8 103.312,132.207 101.676,130.572
VOICEOUT: C16.1 R36.2 U10.5 | length 48.5
  Top Layer w0.508: R36.2 51.054,59.944 C16.1
  Bottom Layer w0.508: R36.2 45.466,65.532 U10.5
pads on no net: J1.1 J2.1 J3.1 J4.1 J5.3 P1.3 R14.2 U1.17 U1.29 U1.30 U2.1 U2.13 U2.15 U2.16 U7.3 U7.5 U7.7 U7.13 U7.15 U7.17 U10.9 U10.10 U10.11 U10.12 U10.13 U10.15

## Keep-outs
Keep-Out Layer:
  lines w0.254: 3.683,14.224 240.411,14.224 240.411,162.56 4.064,162.56 3.683,162.179 3.683,158.877 3.683,14.224

## Silkscreen, mask and mechanical layers (free items; w line width, h text height)
Top Overlay:
  lines w2: 12.192,15.367 13.208,14.351 152.908,14.351 152.781,14.478 152.781,161.798 151.511,163.068 12.573,163.068 12.192,162.687 12.192,15.367

## Text inside footprints (layer, text, board x,y; h text height)
C15: Top Overlay "+" at 47.6,88.523 h1.5 r90